# Altium PCB PCB1.PcbDoc
Units mil, origin at the board's own origin, x right, y up, seen from the top; angles counter-clockwise.
Board outline 3425.2 x 395 mil, 2 copper layers (Top Layer, Bottom Layer); 3 components, 4 nets, 21 pads, 9 vias.
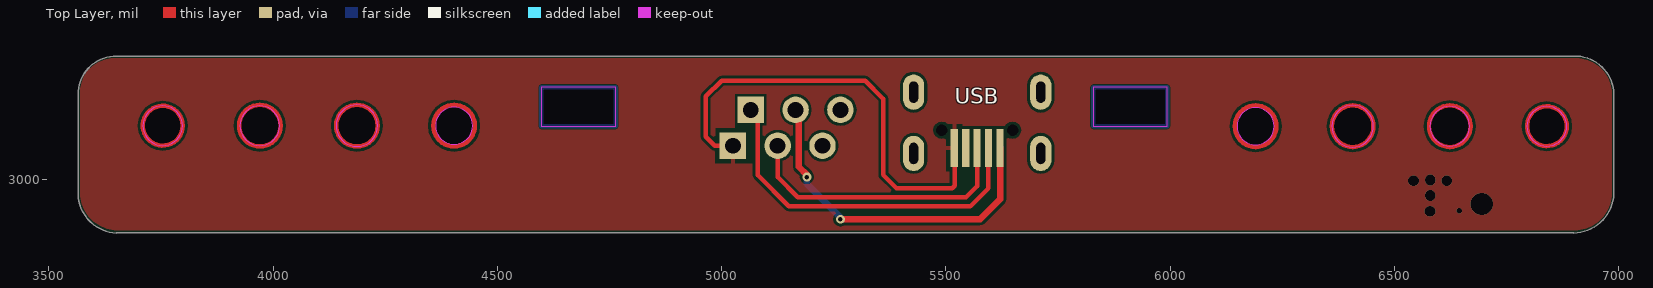
[diagram p0: Top Layer view]
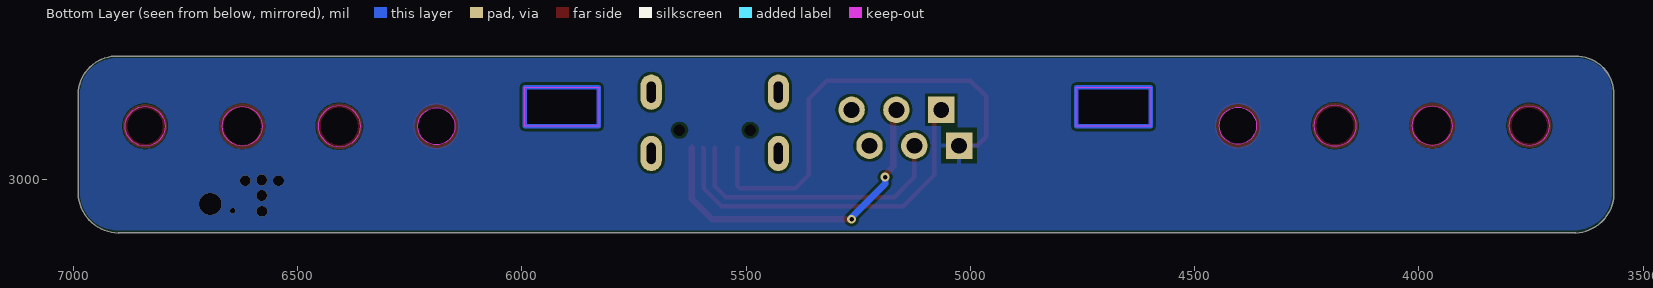
[diagram p1: Bottom Layer view, seen from below]

## Layer stack, top to bottom
Top Solder: solder mask 0.4, Solder Resist, Dk 3.5
Top Layer: signal copper 1.4
Dielectric 1: dielectric 12.6, FR-4, Dk 4.8
Bottom Layer: signal copper 1.4
Bottom Solder: solder mask 0.4, Solder Resist, Dk 3.5

## Board outline
3565,2975 ccw(c3655,2970) 3650,2880 3650,2881.3 6900,2881.3 6900,2880 ccw(c6897.5,2972.5) 6990,2975 6990,3190 ccw(c6902.5,3187.5) 6900,3275 3650,3275 ccw(c3650,3190) 3565,3190 3564.8,3190
cut-out: 4444.7,3119.58 ccw(c4403.37,3119.58) 4403.37,3160.92 ccw(c4403.37,3119.58) 4362.03,3119.58 ccw(c4403.37,3119.58) 4403.37,3078.24 ccw(c4403.37,3119.58)
cut-out: 4233.17,3119.58 ccw(c4186.83,3119.58) 4186.83,3165.92 ccw(c4186.83,3119.58) 4140.49,3119.58 ccw(c4186.83,3119.58) 4186.83,3073.24 ccw(c4186.83,3119.58)
cut-out: 4014.67,3119.58 ccw(c3970.3,3119.58) 3970.3,3163.95 ccw(c3970.3,3119.58) 3925.93,3119.58 ccw(c3970.3,3119.58) 3970.3,3075.21 ccw(c3970.3,3119.58)
cut-out: 3798.13,3119.58 ccw(c3753.76,3119.58) 3753.76,3163.95 ccw(c3753.76,3119.58) 3709.39,3119.58 ccw(c3753.76,3119.58) 3753.76,3075.21 ccw(c3753.76,3119.58)
cut-out: 6795.98,3118.39 ccw(c6840.35,3118.39) 6840.35,3074.02 ccw(c6840.35,3118.39) 6884.72,3118.39 ccw(c6840.35,3118.39) 6840.35,3162.76 ccw(c6840.35,3118.39)
cut-out: 6579.45,3118.39 ccw(c6623.82,3118.39) 6623.82,3074.02 ccw(c6623.82,3118.39) 6668.19,3118.39 ccw(c6623.82,3118.39) 6623.82,3162.76 ccw(c6623.82,3118.39)
cut-out: 6360.94,3118.39 ccw(c6407.28,3118.39) 6407.28,3072.05 ccw(c6407.28,3118.39) 6453.62,3118.39 ccw(c6407.28,3118.39) 6407.28,3164.72 ccw(c6407.28,3118.39)
cut-out: 6149.41,3118.39 ccw(c6190.75,3118.39) 6190.75,3077.05 ccw(c6190.75,3118.39) 6232.09,3118.39 ccw(c6190.75,3118.39) 6190.75,3159.72 ccw(c6190.75,3118.39)
cut-out: 5828.54,3118.39 5993.9,3118.39 5993.9,3205 5828.54,3205
cut-out: 4598.19,3118.39 4763.54,3118.39 4763.54,3205 4598.19,3205

## Design rules (kind name [scope] priority, off if disabled: settings)
Clearance [All] p1: gap=6 ignorepadtopadclearanceinfootprint=FALSE
ComponentClearance [All] p1: gap=0 collisioncheckmode=3 verticalgap=0 showdistances=FALSE
PolygonConnect [All] p1: thpad.connectstyle=Relief thpad.reliefconductorwidth=10 thpad.reliefentries=4 thpad.polygonreliefangle="90 Angle" thpad.airgapwidth=10 smdpad.connectstyle=Relief smdpad.reliefconductorwidth=10 smdpad.reliefentries=4 smdpad.polygonreliefangle="90 Angle" smdpad.airgapwidth=10 via.connectstyle=Direct via.reliefconductorwidth=10 via.reliefentries=4 via.polygonreliefangle="90 Angle" via.airgapwidth=10
RoutingVias [All] p1: holewidth=28 width=24 viastyle="Through Hole" minholewidth=28 minwidth=12 maxholewidth=28 maxwidth=27
SolderMaskExpansion [All] p1: expansion=4 istentingtop=FALSE
Width Width_1 [InNet('VCC')] p1: maxlimit=18 minlimit=10 preferedwidth=15
Width [All] p2: maxlimit=10 minlimit=10 preferedwidth=10
29 further rules are at their usual default settings.

## Components (designator, comment, footprint, x,y, rotation, side; value= is the part's Value field where it differs from the comment)
Lower "Header 3" HDR1X3 5025,3075 r0 top
Top "Header 3" HDR1X3 5065,3155 r0 top
USB "" MICROUSB-5S 5570,3279.06 r180 top

## Footprints (in the part's own frame and the unit in brackets; to place one, negate y for a bottom-side part, rotate by r counter-clockwise, add the part's x,y. Pads: shape width x height; smd on the part's side, far side on the other; paste and mask are expansions set on the pad)
HDR1X3 [mm] "Connector; Header; 3 Position"
  rect 1.5x1.5 hole 0.9: 1(0,0)
  round 1.5 hole 0.9: 2(2.54,0) 3(5.08,0)
MICROUSB-5S [mm]
  oval 1.2x2 on Top Paste: 0(-3.6,5.62) 0(-3.6,2.15) 0(3.6,5.62) 0(3.6,2.15)
  round 0.54 hole 0.65 unplated: 0(-2,4.3) 0(2,4.3)
  rect 0.4x2.15 smd: 1(-1.3,5.31) 2(-0.65,5.31) 3(0,5.31) 4(0.65,5.31) 5(1.3,5.31)
  oval 1.2x2 hole 0.5 slot 1.2 at 90 deg: 6(-3.6,5.62) 7(3.6,5.62) 8(-3.6,2.15) 9(3.6,2.15)

## Part data
Lower Top: "Header, 3-Pin", LatestRevisionDate=17-Jul-2002, LatestRevisionNote="Re-released for DXP Platform.", Publisher="Altium Limited"
USB: library part "Micro USB 母座 5P"

## Via types
v1: diameter 24, hole 24, Top Layer to Bottom Layer, 5 vias
v2: diameter 20, hole 10, Top Layer to Bottom Layer, 2 vias
v3: diameter 50, hole 50, Top Layer to Bottom Layer, 1 vias
v4: diameter 12, hole 12, Top Layer to Bottom Layer, 1 vias

## Nets (pads, with @x,y where several pads share a name; then routed paths per layer and width w, separated by ;. In a path a pad name is that pad's centre, name@x,y a point inside that pad or via, vN(x,y) a via of type N, cw(c..) or ccw(c..) an arc to the next point about the centre after c; other vN are vias at no path point)
D+: Lower.2 USB.3 | length 629
  Top Layer w10: Lower.2 5125,3005 5170,2960 5545,2960 5570,2985 USB.3
D-: Top.1 USB.2 | length 802
  Top Layer w10: Top.1 5080.47,3139.53 5080.47,3009.53 5150,2940 5555,2940 5595,2980 5595,3069.41 USB.2
GND: Lower.1 USB.5 | length 1015.7
  Top Layer w10: Lower.1@5020.47,3075 4985,3075 4965,3095 4965,3185 5000,3220 5320,3220 5360,3180 5360,3010 5390,2980 5514.14,2980 5520,2985.86 5520,3068.82 USB.5 ; Lower.1@5020.47,3079.53 Lower.1
  other v1: 6579.97,2928.74 6580.2,2963.75 6542.98,2996.96 6617.02,2996.96 6580,2998.35
  other v3: 6695,2945
  other v4: 6645,2930
VCC: Top.2 USB.1 | length 774.3
  Top Layer w15: Top.2 5172.03,3147.97 5172.03,3027.97 5190,3010 v2(5190,3005) ; v2(5265,2911) 5576,2911 5621.35,2956.35 5621.35,2994.83 5621.18,2995 USB.1
  Bottom Layer w15: v2(5190,3005) 5190,2990 5265,2915 v2(5265,2911)
pads on no net: Lower.3 Top.3 USB.0 USB.4 USB.6 USB.7 USB.8 USB.9
copper on no net: | length 3312.4
  Top Layer w10: 3798.13,3119.58 ccw(c3753.76,3119.58) 3798.13,3119.58 ; 4016.63,3119.58 ccw(c3970.3,3119.58) 4016.63,3119.58 ; 4233.17,3119.58 ccw(c4186.83,3119.58) 4233.17,3119.58 ; 4449.71,3119.58 ccw(c4403.37,3119.58) 4449.71,3119.58 ; 6237.09,3118.39 ccw(c6190.75,3118.39) 6237.09,3118.39 ; 6453.62,3118.39 ccw(c6407.28,3118.39) 6453.62,3118.39 ; 6670.16,3118.39 ccw(c6623.82,3118.39) 6670.16,3118.39 ; 6884.72,3118.39 ccw(c6840.35,3118.39) 6884.72,3118.39
  Bottom Layer w10: 4598.19,3118.39 4598.19,3205 4763.54,3205 4763.54,3118.39 4598.19,3118.39 ; 5828.54,3118.39 5828.54,3205 5993.9,3205 5993.9,3118.39 5828.54,3118.39

## Polygon pours and split planes (outlines as drawn)
no net on Mechanical 1 (solid): 3569.92,3269.92
GND on Top Layer "GND_L01_P005" (solid, pour order 5): 3570,3195 3570,2970 ccw(c3653.58,2970) 3653.58,2886.42 6901.33,2886.33 ccw(c6901.33,2969.95) 6984.95,2969.95 6984.95,3190.05 ccw(c6905.06,3190.05) 6905.06,3269.94 3645,3270 ccw(c3645,3195)
GND on Bottom Layer "GND_L02_P004" (solid, pour order 4): 3570,3195 3570,2970 ccw(c3653.58,2970) 3653.58,2886.42 6901.33,2886.33 ccw(c6901.33,2969.95) 6984.95,2969.95 6984.95,3190.05 ccw(c6905.06,3190.05) 6905.06,3269.94 3645,3270 ccw(c3645,3195)